# EAGLE board ASL1002 (EAGLE 6.2)
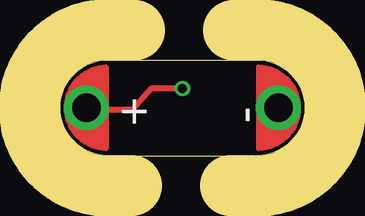
[diagram p0: board, top side]
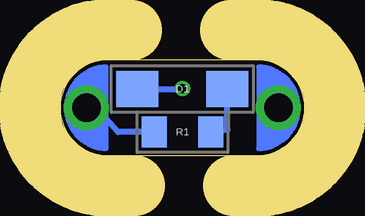
[diagram p1: board, bottom side, seen from below]

Size 10.2 x 4 mm. Coordinates in mm from the lower left corner, seen from the top.
Outline: 2,0 arc-180 2,4 8.2,4 arc-180 8.2,0 2,0
Copper layers (1*16): Top 0.035mm / dielectric 1.5mm / Bottom 0.035mm
Design rules: minimum track width 8mil, minimum drill 15mil, track to track 6mil, track to pad 6mil, pad to pad 6mil, via to via 6mil, smd to smd 6mil, copper to edge 6mil, drill to drill 8mil, minimum pad ring 8mil, minimum via ring 5mil, stop-mask expansion 4mil, vias tented up to drill 25mil, thermal gap 10mil
Milling: 6 lines

## Footprints (pad centres in the part's own frame; a part is rotated, then mirrored left to right if it is on the bottom)
1206_LED = smd 1.75 x 1.5: 1 -1.875,0; 2 1.875,0
R0805 = smd 1.05 x 1.3: 1 -1.175,0; 2 1.175,0
SEWTAP_TH_1206 = drill 1.2 pad 1.867: 1 0,0

## Placement (x,y rotation side)
D1  GREEN  [1206_LED]  5.1,2.79 0 bottom
R1  150  [R0805]  5.1,0.99 180 bottom
U$1  SEWTABTH_1206  [SEWTAP_TH_1206]  9.1,2 180 top
U$6  [DOCFIELD-TINYCIRCUITS-PCB]  29.1,-18 0 top  (outside the outline)
U$7  SEWTABTH_1206  [SEWTAP_TH_1206]  1.1,2 0 top

## Library data of the parts
D1 = tinycircuits; PARTNO: AS-ITM-00039
R1 = tinycircuits; PARTNO: AS-ITM-00040
U$1 U$7 = tinycircuits; BOM: EXCLUDE; DATABASE: ./../../../../../Components/TinyCircuits_Part_Database.txt; DNP: T
U$6 = tinycircuits; NO_BOM: T

## Nets
+: D1.1 U$7.1
-: R1.2 U$1.1
N$2: D1.2 R1.1

## Tracks (layer width: path | path; a pad name or v marks a point on that pad's centre or on a via)
+  (via drill 0.38)
  Top 0.254: v5.1,2.8 3.8,2.8 3,1.9 1.2,1.9 U$7.1
  Bottom 0.254: D1.1 5.19,2.79 v5.1,2.8
-
  Bottom 0.254: R1.2 7.79,0.99 8.6,1.9 9,1.9 U$1.1
N$2
  Bottom 0.254: R1.1 3.23,1.09 D1.2

## Text on the board
tPlace: + | -
Document: FABRICATION DRAWING | NOTES: | 1. PRINTED CIRCUIT BOARD MADE FROM NEMA GRADE FR-4 EPOXY LAMINATE | WITH 1 OUNCE COPPER PLATING AND .024 THICKNESS. | 2. ALL DIMENSIONS ARE GIVEN IN INCHES. | 3. CIRCUIT PATHS ARE FOR REFERENCE ONLY. | 4. HOLE SIZES SHOWN ARE FINISHED DIAMETERS AFTER PLATING. | 5. BOARD PLATED USING REFLOW OR SIMILAR METHOD. | 6. BOARD TO HAVE BLUE SOLDER MASK ON PLATED SURFACES USING WET FILM | 7. SILKSCREEN BOARD USING WHITE INK. | SR100 OR SR1010 EPOXY. EQUIVALENT WET OR DRY FILM MAY BE USED. | 8. THE FOLLOWING INFORMATION APPLIES TO THIS BOARD: | * 2 COPPER LAYERS | * .024 BOARD THICKNESS | * REQUIRES TOP SIDE SILKSCREEN | Released under the Creative Commons Attribution Share-Alike 3.0 License | http://creativecommons.org/licenses/by-sa/3.0 | Original Arduino Uno Design by Team Arduino | LilyPad Arduino Design by Leah Buechley and Sparkfun Electronics | TinyDuino, TinyLily and TinyShield Designs by TinyCircuits | TinyLily LED - 1206 | AS-PCB-ASL1002 | 1